# Altium PCB H_bridge_2_layers_fix.PcbDoc
Units mil, origin at the board's own origin, x right, y up, seen from the top; angles counter-clockwise.
Board outline 2814.96 x 3011.81 mil, 2 copper layers (Top Layer, Bottom Layer); 43 components, 19 nets, 107 pads, 13 vias.
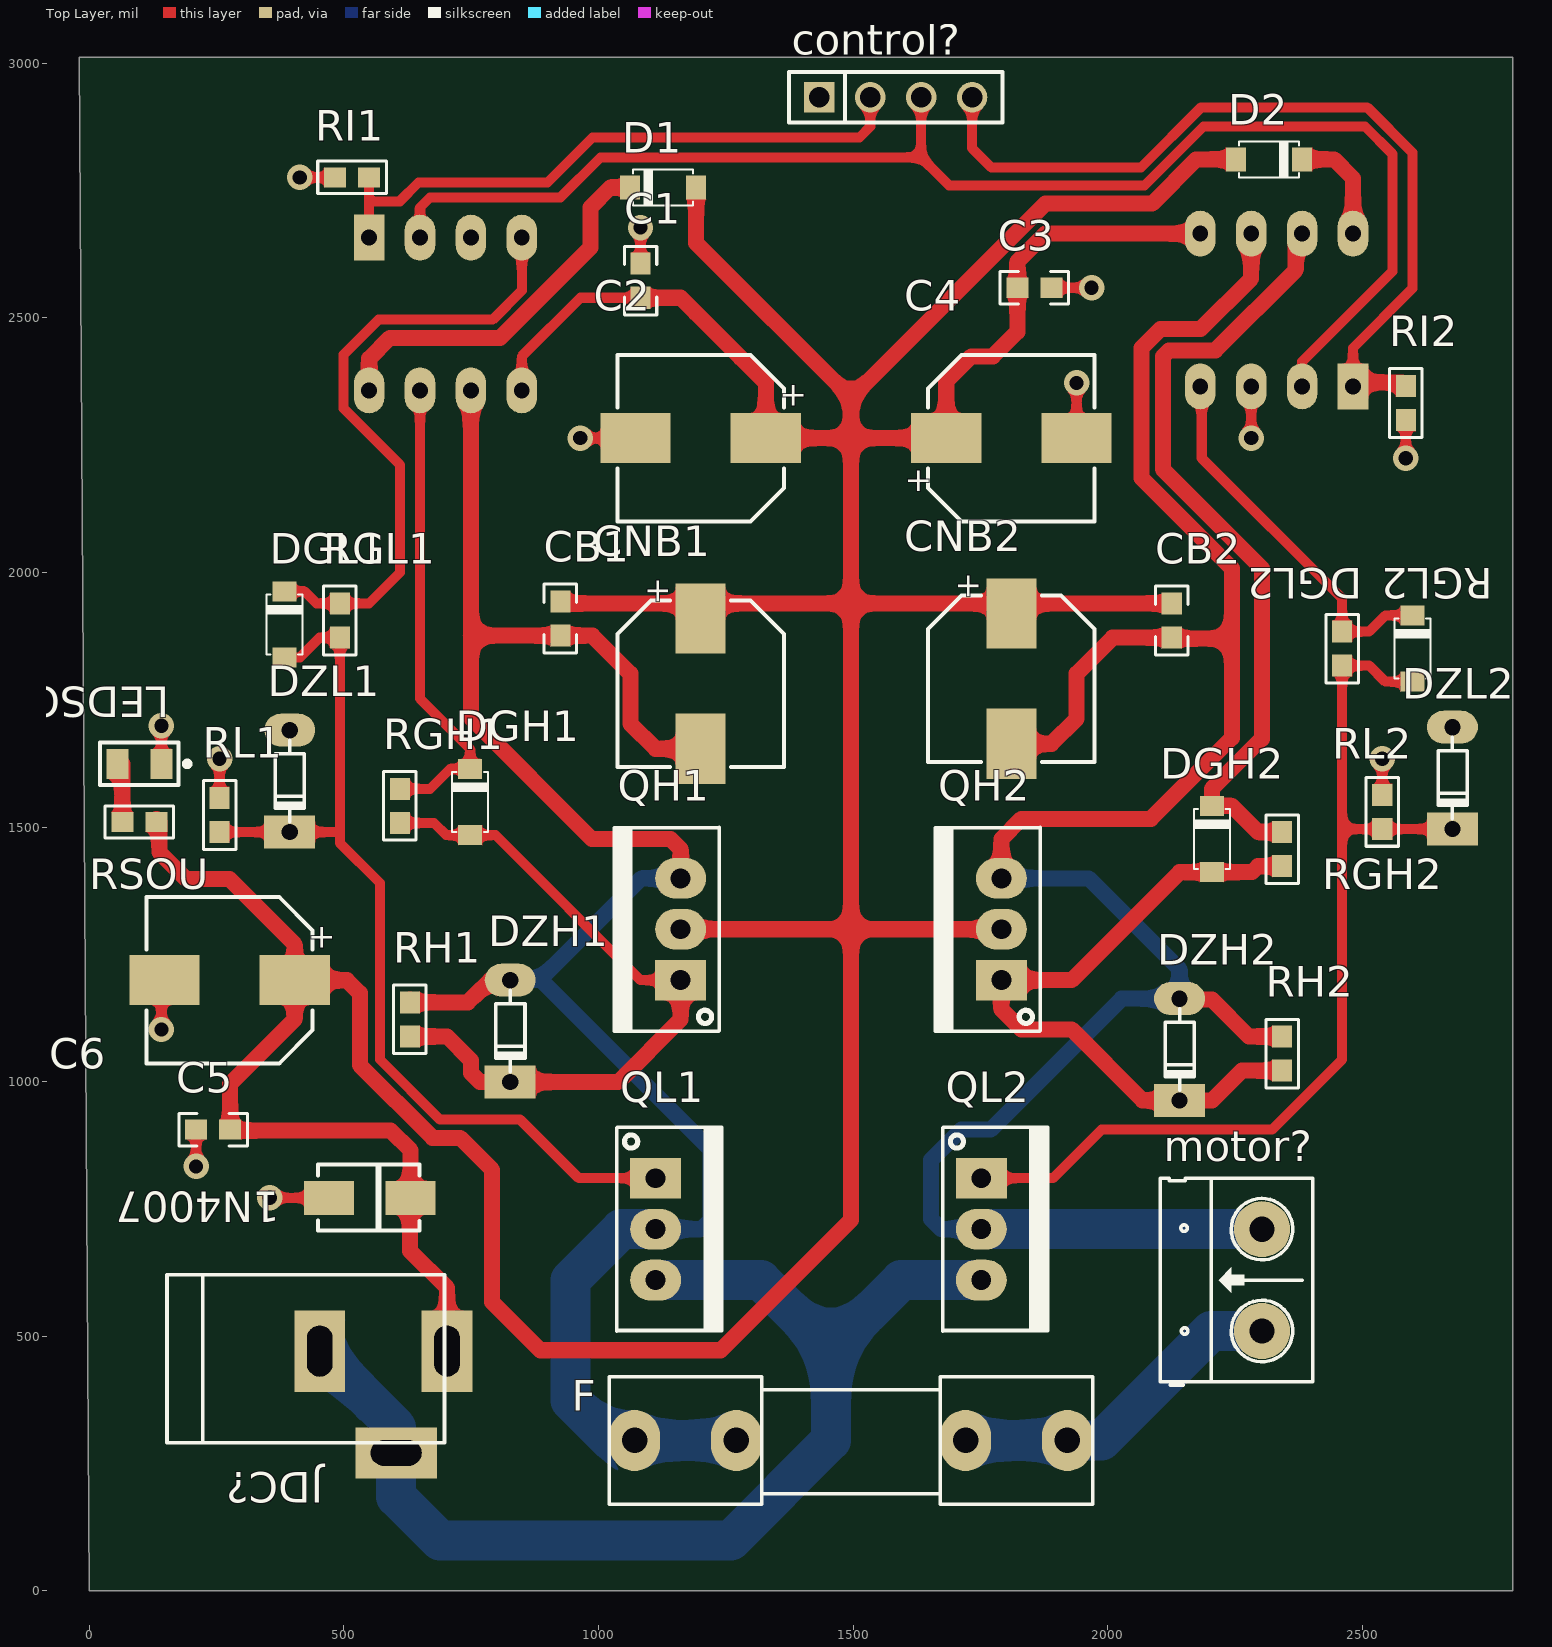
[diagram p0: Top Layer view]
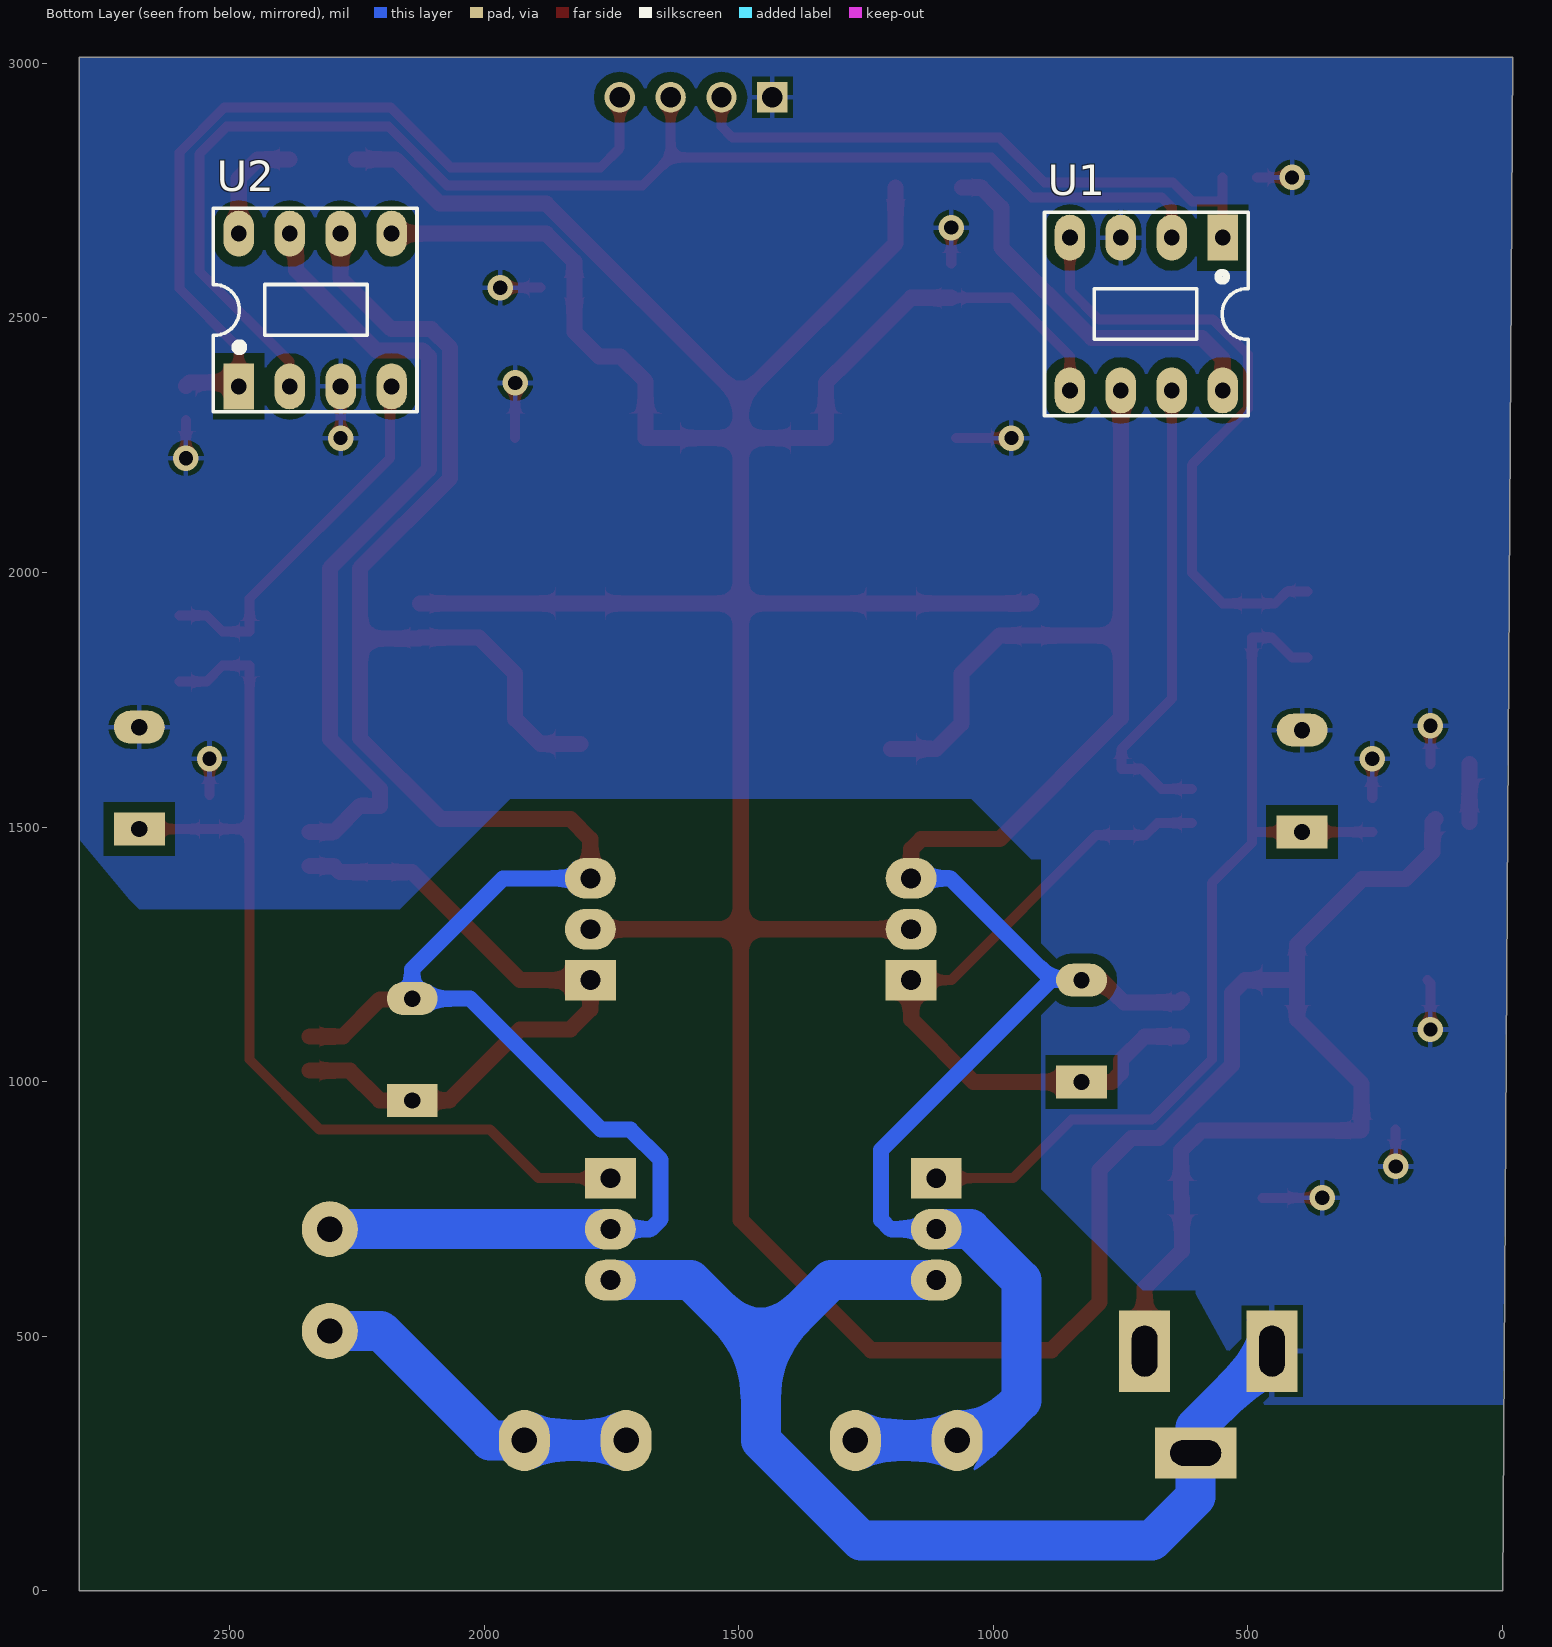
[diagram p1: Bottom Layer view, seen from below]
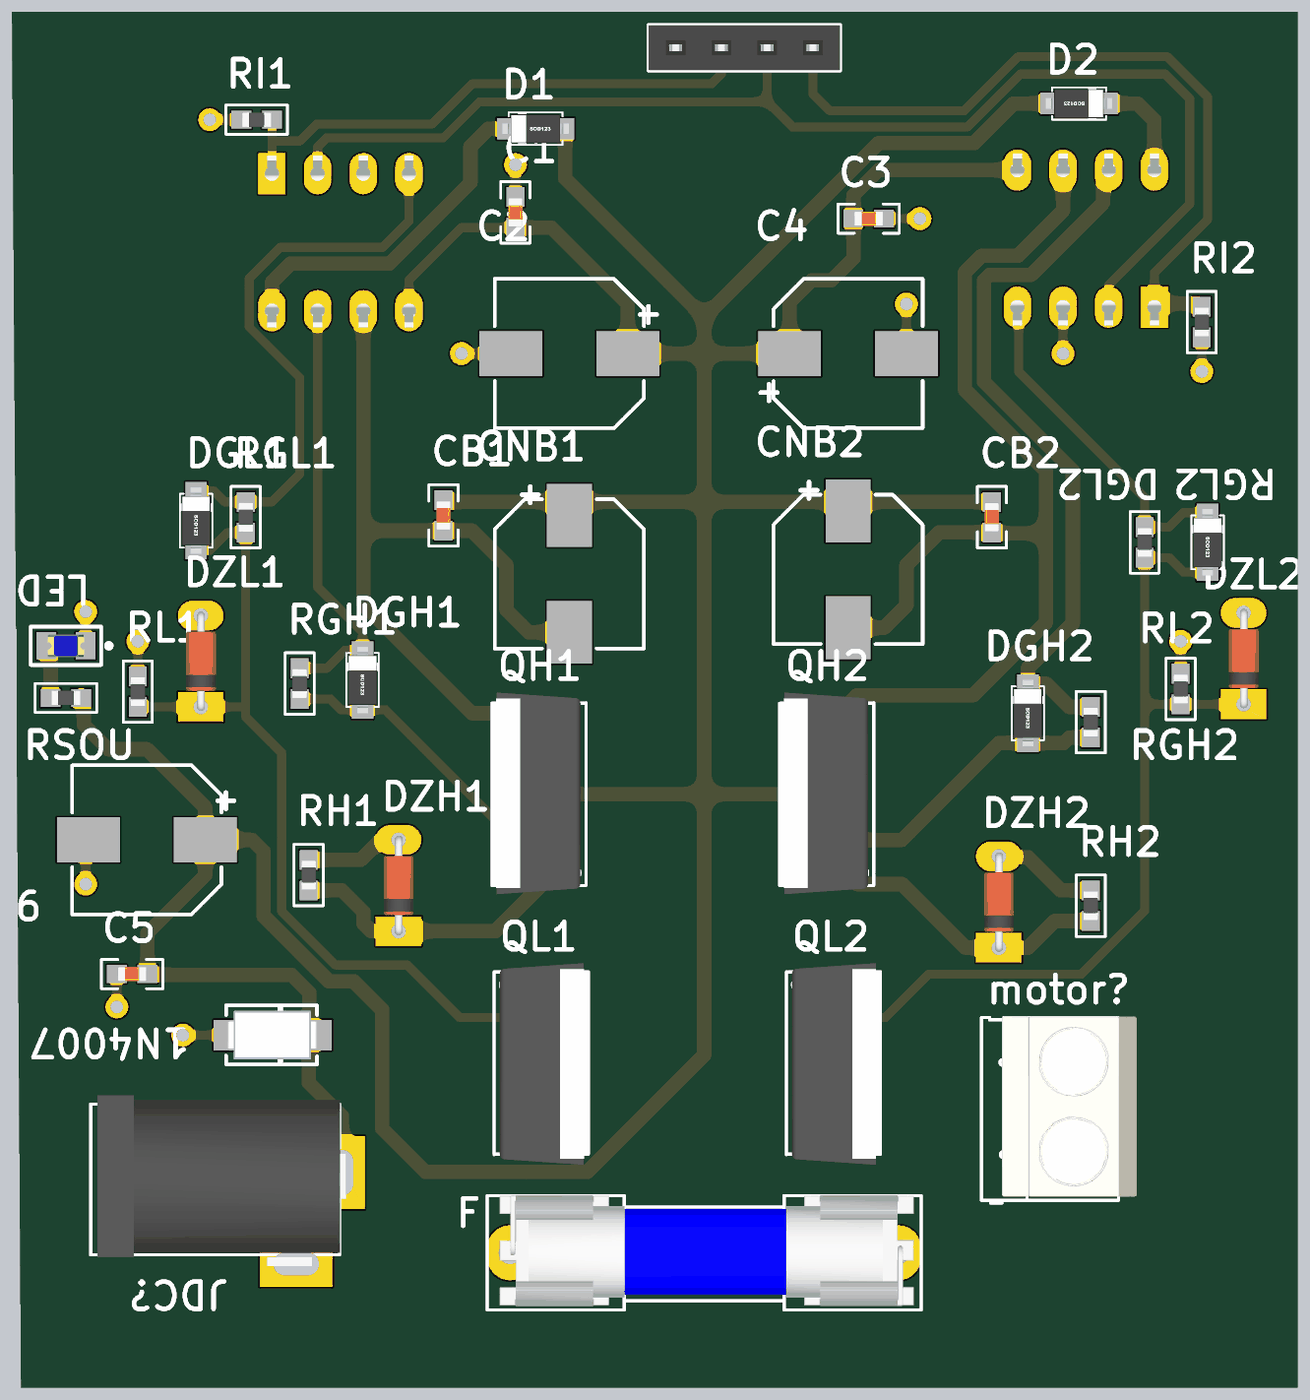
[diagram p2: 3D render of the assembled board from above, using the file's embedded part models]

## Layer stack, top to bottom
Top Solder: solder mask 0.4, Solder Resist, Dk 3.5
Top Layer: signal copper 1.4
Dielectric 1: dielectric 12.6, FR-4, Dk 4.8
Bottom Layer: signal copper 1.4
Bottom Solder: solder mask 0.4, Solder Resist, Dk 3.5

## Board outline
-19.69,3011.81 2795.28,3011.81 2795.28,0 0,0

## Design rules (kind name [scope] priority, off if disabled: settings)
Clearance Clearance_1 [InNamedPolygon('Bottom Layer-No Net')] p1: gap=10 ignorepadtopadclearanceinfootprint=FALSE except(0: Arc-Hole Track-Hole SMDPad-Hole THPad-Hole Via-Hole Fill-Hole Poly-Hole Region-Hole Text-Hole; 20: Arc-Fill Arc-Poly Arc-Region Track-Fill Track-Poly Track-Region THPad-Fill THPad-Poly THPad-Region)
Clearance [All] p2: gap=10 ignorepadtopadclearanceinfootprint=FALSE except(0: Arc-Hole Track-Hole SMDPad-Hole THPad-Hole Via-Hole Fill-Hole Poly-Hole Region-Hole Text-Hole; 20: Arc-Fill Arc-Poly Arc-Region Track-Fill Track-Poly Track-Region THPad-Fill THPad-Poly THPad-Region)
PolygonConnect PolygonConnect_1 [All vs IsNamedPolygon('Bottom Layer-No Net')] p1: connectstyle=Relief reliefconductorwidth=10 reliefentries=4 polygonreliefangle="90 Angle" airgapwidth=10
PolygonConnect [All] p2: connectstyle=Relief reliefconductorwidth=10 reliefentries=4 polygonreliefangle="90 Angle" airgapwidth=10
RoutingVias [All] p1: holewidth=28 width=50 viastyle="Through Hole" minholewidth=28 minwidth=50 maxholewidth=28 maxwidth=50
SolderMaskExpansion [All] p1: expansion=4
Width [All] p1: maxlimit=78.74 minlimit=19.68 preferedwidth=31.5
30 further rules are at their usual default settings.

## Classes and differential pairs
component class H_bridge: C5 C6 DGH1 DGH2 DGL1 DGL2 DZH1 DZH2 DZL1 DZL2 JDC? LEDSOU motor? QH1 QH2 QL1 QL2 RGH1 RGH2 RGL1 RGL2 RH1 RH2 RL1 RL2 RSOU
component class driver: C1 C2 C3 C4 CB1 CB2 CNB1 CNB2 control? D1 D2 RI1 RI2 U1

## Components (designator, comment, footprint, x,y, rotation, side; value= is the part's Value field where it differs from the comment)
1N4007 "DSOU" DIODE_DO214AC_SMA 551.18,771.79 r0 top value=1000V/1A
C1 "104" "CAPC-0603 (1608)" 1082.68,2572.83 r270 top value=330p/50V
C2 "10uF" CAP_ALUM_SMT_NICHICON_H8xH10 1200.79,2263.78 r180 top value=100uF/50V
C3 "104" "CAPC-0603 (1608)" 1856.3,2559.06 r180 top value=330p/50V
C4 "10uF" CAP_ALUM_SMT_NICHICON_H8xH10 1811.02,2263.78 r0 top value=100uF/50V
C5 "104" "CAPC-0603 (1608)" 243.4,905.51 r0 top value=330p/50V
C6 "10uF" CAP_ALUM_SMT_NICHICON_H8xH10 275.59,1199.21 r180 top value=100uF/50V
CB1 "104" "CAPC-0603 (1608)" 925.2,1909.45 r90 top value=330p/50V
CB2 "104" "CAPC-0603 (1608)" 2125.98,1905.51 r90 top value=330p/50V
CNB1 "10uF" CAP_ALUM_SMT_NICHICON_H8xH10 1200.79,1781.5 r270 top value=100uF/50V
CNB2 "10uF" CAP_ALUM_SMT_NICHICON_H8xH10 1811.02,1791.34 r270 top value=100uF/50V
control? "JP4" JP4-C1T 1433.86,2933.07 r0 top
D1 "1N4148" SOD-123 1126.77,2755.91 r90 top value=100V/300MA
D2 "1N4148" SOD-123 2316.85,2811.02 r270 top value=100V/300MA
DGH1 "1N4148" SOD-123 748.03,1549.13 r0 top value=100V/300MA
DGH2 "1N4148" SOD-123 2204.72,1476.38 r0 top value=100V/300MA
DGL1 "1N4148" SOD-123 383.46,1897.8 r0 top value=100V/300MA
DGL2 "1N4148" SOD-123 2598.43,1850.39 r0 top value=100V/300MA
DZH1 "DIODE Zener" DIO-0.5A-SMALL 826.77,1099.21 r90 top
DZH2 "DIODE Zener" DIO-0.5A-SMALL 2141.26,1062.99 r90 top
DZL1 "DIODE Zener" DIO-0.5A-SMALL 393.7,1590.16 r90 top
DZL2 "DIODE Zener" DIO-0.5A-SMALL 2677.17,1596.06 r90 top
F "F1A" Fuse 1496.06,295.28 r0 top value=Fuse
JDC? "Jac DC" DC-IN 577.76,370.87 r0 top
LEDSOU "=Value" LED_0805_BLUE 98.43,1624.02 r0 top
motor? "Header 2_1" HED2 2303.15,510.24 r90 top value="Header 2"
QH1 "IRF840" QTO-220 1161.42,1199.21 r90 top
QH2 "IRF840" QTO-220 1791.34,1199.21 r90 top
QL1 "IRF840" QTO-220 1112.2,810.24 r270 top
QL2 "IRF840" QTO-220 1751.97,810.24 r270 top
RGH1 "1k" "RESC-0603 (1608)" 610.24,1541.34 r90 top value=NF
RGH2 "1k" "RESC-0603 (1608)" 2342.52,1456.69 r270 top value=NF
RGL1 "1k" "RESC-0603 (1608)" 492.13,1905.51 r90 top value=NF
RGL2 "1k" "RESC-0603 (1608)" 2460.63,1850.39 r270 top value=NF
RH1 "4.7k" "RESC-0603 (1608)" 629.92,1122.05 r270 top value=NF
RH2 "4.7k" "RESC-0603 (1608)" 2342.52,1055.12 r270 top value=NF
RI1 "1k" "RESC-0603 (1608)" 516.14,2775.59 r0 top value=NF
RI2 "1k" "RESC-0603 (1608)" 2585.66,2332.68 r90 top value=NF
RL1 "4.7k" "RESC-0603 (1608)" 255.91,1523.62 r270 top value=NF
RL2 "4.7k" "RESC-0603 (1608)" 2539.37,1529.53 r270 top value=NF
RSOU "1k" "RESC-0603 (1608)" 98.43,1509.84 r0 top value=NF
U1 "IR2184" DIP8/W0.3 549.61,2657.48 r0 bottom
U2 "IR2184" DIP8/W0.3 2481.89,2365.35 r180 bottom

## Footprints (in the part's own frame and the unit in brackets; to place one, negate y for a bottom-side part, rotate by r counter-clockwise, add the part's x,y. Pads: shape width x height; smd on the part's side, far side on the other; paste and mask are expansions set on the pad)
CAP_ALUM_SMT_NICHICON_H8xH10 [mm]
  rect 3.5x2.5 smd: 1(-3.25,0) 2(3.25,0)
  silkscreen extent -4.15,-4.15 4.15,4.15, body extent -4.15,-4.15 4.15,4.15, height 10.3
"CAPC-0603 (1608)" [mm] "Resistor, Chip; 1.60 mm L X 0.80 mm W X 0.50 mm H body"
  rect 1.1x1 smd mask+0.1: 1(-0.85,0) 2(0.85,0)
  silkscreen extent -1.71,-0.81 1.71,0.81, body extent -0.8,-0.4 0.8,0.4, height 0.6
DC-IN [mil] "Jac DC input"
  rect 100x160 hole 50 slot 100 at 90 deg: 1(125,100) 2(-125,100)
  rect 160x100 hole 50 slot 100 at 0 deg: 3(25,-100)
  silkscreen extent -425,-80 120,250, body extent -410,-105 134,269, height 434
DIO-0.5A-SMALL [mil] "Diode muoi, W 80mil, L 300mil"
  oval 65x100 hole 32: 1(100,0)
  rect 65x100 hole 32: 2(-100,0)
  silkscreen extent -80,-30 80,28, body extent -108,-33 108,32, height 61
DIODE_DO214AC_SMA [mm] "Diode 2214AC- SMA type"
  rect 2.5x1.7 smd: 1(-2.032,0) 2(2.032,0)
  silkscreen extent -2.59,-1.63 2.46,1.7, body extent -2.53,-1.35 2.47,1.35, height 2.25
DIP8/W0.3 [mil] "8 PIN, W 300mil, Pin to pin 100mil"
  rect 60x90 hole 31: 1(0,0)
  oval 60x90 hole 31: 2(100,0) 3(200,0) 4(300,0) 5(300,300) 6(200,300) 7(100,300) 8(0,300)
  silkscreen extent -50,-50 350,350, body extent -50,-40 350,336, height 201
Fuse [mil] "De Fuse"
  oval 100x120 hole 50: 1(-425,0) 1(-225,0) 2(225,0) 2(425,0)
  silkscreen extent -475,-125 475,125, body extent -448,-117 459,127, height 378
HED2 [mil] "Header 2, 2 pin, hight 300mil, Pin to Pin 200, Colour Green"
  round 110 hole 50: 1(0,0) 2(200,0)
  silkscreen extent -106,-100 300,200, body extent -92,-140 302,155, height 394
JP4-C1T [mm] "4 row, straight, gold plating"
  rect 1.52x1.52 hole 1.02: 1(0,0)
  round 1.52 hole 1.02: 2(2.54,0) 3(5.08,0) 4(7.62,0)
  silkscreen extent -1.52,-1.27 9.14,1.27, body extent -1.52,-1.25 9.14,1.25, height 8.51
LED_0805_BLUE [mm] "LED SMD; Body 2.0 x 1.3 mm (LxW typ)"
  rect 1.1x1.5 smd: 1(-1.1,0) 2(1.1,0)
  silkscreen extent -1.96,-1.07 2.52,1.07, body extent -1.01,-0.62 1.01,0.63, height 1.1
QTO-220 [mil] "TO-220 - 1-2-3"
  rect 80x100 hole 39: 1(0,0)
  oval 80x100 hole 39: 2(100,0) 3(200,0)
  silkscreen extent -100,-76 300,130, body extent -119,-64 322,121, height 755
"RESC-0603 (1608)" [mm] "Resistor, Chip; 1.60 mm L X 0.80 mm W X 0.50 mm H body"
  rect 1.1x1 smd mask+0.1: 1(-0.85,0) 2(0.85,0)
  silkscreen extent -1.71,-0.81 1.71,0.81, body extent -0.8,-0.4 0.8,0.4, height 0.5
SOD-123 [mm] "SOD123, 2-Leads, Body 2.6x1.6mm, Pitch 3.05mm, IPC High Density"
  rect 1.2x1 smd: 1(0,-1.652) 2(0,1.652)
  silkscreen extent -0.9,-1.5 0.9,1.5, body extent -0.8,-1.85 0.8,1.85, height 1.27

## Part data
1N4007: library part 1N4007_SMA, "DIODE GEN PURP 1KV 1A SMA", MPN=MRA4007T3G, Solder=SMT
C1 C3 C5 CB1 CB2: library part 0603N331J500CT, "CAP CER 330PF 50V C0G/NP0 0603", MFR="Walsin Technology Corporation", Category=CAPACITOR, MPN=0603N331J500CT, PinCount=2, Solder=SMT
C2 C4 C6 CNB1 CNB2: library part UWT1H101MNL1GS, "CAP ALUM 100UF 20% 50V SMD", Category=CAPACITOR, MPN=UWT1H101MNL1GS, PinCount=2, Solder=SMT
control?: "WR-PHD 2.54 mm Angled Socket Header", Manufacturer="Würth Elektronik eiSos GmbH", partNo=613004143121, ComponentLink1 Description=Manufacturer, ComponentLink1URL=http://www.we-online.com, ComponentLink2 Description=Datasheet, ComponentLink2URL=http://katalog.we-online.de/em/datasheet/6130xx143121.pdf, Created by="Karrer Zheng", Created Date="29 March 2013", NoPins=04
D1 D2 DGH1 DGH2 DGL1 DGL2: library part 1N4148-W-7, "DIODE GEN PURP 100V 300MA SOD123", MFR="Diodes Incorporated", MPN=1N4148W-7-F, Solder=SMT
DZH1 DZH2 DZL1 DZL2: "Zenner"
F: library part Fuse, "Fuse", Designed by=VanDungEvn
JDC?: library part DCIN, "Jac DC input"
LEDSOU: library part "LED SMD BLUE 0805 SMD", "LED BLUE 0805 SMD", CompanyID=VT-01311, Solder=SMT
motor?: "Header, 2-Pin", Manufacturer="Generic Components", Class=Connector
QH1 QH2 QL1 QL2: "MOSFET N - CHANNEL 500V - 0.75 - 8A - TO-220"
RGH1 RGH2 RGL1 RGL2 RH1 RH2 RI1 RI2 RL1 RL2 RSOU: library part "RESC NF 0603", "RES SMD, Not Fill, 0603", Category=RESISTOR, Solder="Not Fill"
U1 U2: "Half-Bridge Driver"

## Via types
v1: diameter 50, hole 28, Top Layer to Bottom Layer, 13 vias

## Nets (pads, with @x,y where several pads share a name; then routed paths per layer and width w, separated by ;. In a path a pad name is that pad's centre, name@x,y a point inside that pad or via, vN(x,y) a via of type N, cw(c..) or ccw(c..) an arc to the next point about the centre after c; other vN are vias at no path point)
12V: 1N4007.2 C1.2 C2.1 C3.2 C4.1 C5.2 C6.1 CB1.2 CB2.2 CNB1.1 CNB2.1 D1.1 D2.1 JDC?.1 QH1.2 QH2.2 RSOU.2 U1.5 U2.5 | length 10213.3
  Top Layer w19.68: U1.5 849.61,2424.41 964.57,2539.37 C1.2
  Top Layer w31.5: RSOU.2@131.89,1515.75 137.8,1509.84 137.8,1450.79 190.94,1397.64 275.59,1397.64 403.54,1269.68 C6.1 ; JDC?.1@704.33,472.44 JDC?.1 702.76,594.88 629.92,667.72 629.92,770.52 1N4007.2 631.2,864.87 592.13,903.94 278.44,903.94 C5.2 276.87,995.37 403.54,1122.05 C6.1 ; CB1.2 929.13,1938.98 1496.06,1938.98 ; C1.2 1161.42,2539.37 1190.94,2509.84 1279.53,2421.26 1328.74,2372.05 C2.1 1496.06,2263.78 ; QH1.2 1496.06,1299.21 ; D1.1 1191.81,2646.77 1496.06,2342.52 ; QH2.2 1496.06,1299.21 ; CB2.2 1496.06,1938.98 ; U2.5@2165.35,2665.35 1877.95,2665.35 1822.83,2610.24 C3.2 1822.83,2472.44 1774.8,2424.41 1732.28,2424.41 1683.07,2375.2 C4.1 1496.06,2263.78 ; D2.1 2173.85,2811.02 2087.23,2724.41 1877.95,2724.41 1496.06,2342.52 ; C6.1 505.91,1199.21 531.5,1173.62 531.5,1032.34 674.23,889.61 728.35,889.61 791.18,826.77 791.18,567.09 885.83,472.44 1240.16,472.44 1496.06,728.35 1496.06,1299.21 ; 1496.06,1299.21 1496.06,1938.98 ; 1496.06,1938.98 1496.06,2263.78 ; 1496.06,2263.78 1496.06,2342.52
GND: 1N4007.1 C1.1 C2.2 C3.1 C4.2 C5.1 C6.2 control?.1 DZL1.1 DZL2.1 JDC?.2 JDC?.3 LEDSOU.2 QL1.3 QL2.3 RI1.1 RI2.1 RL1.1 RL2.1 U1.3 U2.3 | length 3363.3
  Top Layer w19.68: v1(141.73,1102.36) 141.73,1193.31 C6.2 ; LEDSOU.2 v1(141.73,1698.82) ; v1(209.94,833.37) C5.1 ; RL1.1 v1(255.91,1633.86) ; v1(354.33,771.79) 1N4007.1 ; v1(413.39,2775.59) RI1.1 ; v1(964.57,2263.78) C2.2 ; C1.1 v1(1082.68,2677.17) ; C3.1 v1(1968.5,2559.06) ; C4.2 v1@1938.98,2362.2 ; v1(2281.89,2263.78) U2.3 ; RL2.1 v1(2539.37,1633.86) ; v1(2585.66,2224.41) RI2.1
  Bottom Layer w78.74: JDC?.2 602.76,320.87 JDC?.3 602.76,184.65 688.98,98.43 1259.84,98.43 1456.69,295.28 1456.69,472.44 ; QL1.3 1318.9,610.24 1456.69,472.44 ; QL2.3 1594.49,610.24 1456.69,472.44
  other v1: 1938.98,2372.05
NetCB1_1: CB1.1 CNB1.2 DZH1.1 F.1 QH1.3 QL1.2 RH1.1 U1.6 | length 3986.6
  Top Layer w31.5: RH1.1@629.92,1161.42 635.83,1155.51 743.7,1155.51 787.4,1199.21 DZH1.1 ; U1.6 749.61,1875.98 ; QH1.3 1161.42,1456.69 1141.73,1476.38 987.4,1476.38 749.61,1714.17 749.61,1875.98 ; CNB1.2 1112.2,1653.54 1062.99,1702.76 1062.99,1801.18 988.19,1875.98 CB1.1 749.61,1875.98
  Bottom Layer w31.5: DZH1.1 884.25,1199.21 ; QL1.2 1202.36,710.24 1220.47,728.35 1220.47,866.14 887.4,1199.21 884.25,1199.21 ; QH1.3 1084.25,1399.21 884.25,1199.21
  Bottom Layer w78.74: QL1.2 1044.88,710.24 944.88,610.24 944.88,374.02 1023.62,295.28 1071.06,295.28 F.1@1271.06,295.28
NetCB2_1: CB2.1 CNB2.2 DZH2.1 motor?.2 QH2.3 QL2.2 RH2.1 U2.6 | length 4487
  Top Layer w31.5: QH2.3 1791.34,1476.38 1830.71,1515.75 2085.04,1515.75 2244.09,1674.8 2244.09,1870.08 ; CNB2.2 1889.76,1663.39 1938.98,1712.6 1938.98,1801.18 2009.84,1872.05 CB2.1 2127.95,1870.08 2244.09,1870.08 ; DZH2.1 2142.83,1161.42 2204.72,1161.42 2277.56,1088.58 RH2.1 ; U2.6@2272.27,2658.27 2281.89,2648.65 2281.89,2577.17 2182.32,2477.6 2103.58,2477.6 2066.93,2440.94 2066.93,2185.04 2244.09,2007.87 2244.09,1870.08
  Bottom Layer w31.5: QL2.2 1673.23,710.24 1653.54,729.92 1653.54,846.46 1712.6,905.51 1770.08,905.51 2027.56,1162.99 DZH2.1 2141.26,1220.47 1962.52,1399.21 QH2.3
  Bottom Layer w78.74: QL2.2 motor?.2
Netcontrol?_3: control?.3 U1.2 U2.2 | length 2750.3
  Top Layer w19.68: U1.2 649.61,2716.54 669.29,2736.22 925.2,2736.22 1003.94,2814.96 1633.86,2814.96 ; control?.3 1633.86,2814.96 ; U2.2 2381.89,2413.7 2559.06,2590.87 2559.06,2822.03 2505.5,2875.59 2188.08,2875.59 2072.49,2760 1688.82,2760 1633.86,2814.96
NetD1_2: D1.2 U1.8 | length 759.7
  Top Layer w31.5: U1.8 549.61,2419.68 590.55,2460.63 807.09,2460.63 984.25,2637.8 984.25,2716.54 1023.62,2755.91 D1.2
NetD2_2: D2.2 U2.8 | length 221.4
  Top Layer w31.5: D2.2 2444.88,2811.02 2481.89,2774.02 2481.89,2686 U2.8@2469.12,2673.23
NetDGH1_1: DGH1.1 DZH1.2 QH1.1 RGH1.1 RH1.2 | length 1389.9
  Top Layer w19.68: RGH1.1 677.17,1507.87 700.94,1484.09 DGH1.1 797.8,1484.09 1082.68,1199.21 QH1.1
  Top Layer w31.5: RH1.2 702.76,1088.58 749.61,1041.73 749.61,1017.32 767.72,999.21 DZH1.2 1038.58,999.21 1161.42,1122.05 QH1.1
NetDGH1_2: DGH1.2 RGH1.2 U1.7 | length 938.2
  Top Layer w19.68: RGH1.2 669.29,1574.8 708.66,1614.17 DGH1.2 748.03,1653.54 649.61,1751.97 U1.7
NetDGH2_1: DGH2.1 DZH2.2 QH2.1 RGH2.2 RH2.2 | length 1351
  Top Layer w31.5: RH2.2 2263.78,1021.65 2205.12,962.99 DZH2.2 2068.5,962.99 1929.13,1102.36 1830.71,1102.36 1791.34,1141.73 QH2.1 1929.13,1199.21 2141.26,1411.34 DGH2.1 2283.46,1411.34 2295.35,1423.23 RGH2.2
NetDGH2_2: DGH2.2 RGH2.1 U2.7 | length 1573.5
  Top Layer w31.5: RGH2.1 2295.35,1490.16 2244.09,1541.42 DGH2.2 2204.72,1574.8 2303.15,1673.23 2303.15,2007.87 2108.43,2202.6 2108.43,2423.76 2120.77,2436.1 2211.69,2436.1 2369.12,2593.53 U2.7@2369.12,2673.23
NetDGL1_1: DGL1.1 DZL1.2 QL1.1 RGL1.1 RL1.2 | length 1862.8
  Top Layer w19.68: RL1.2 DZL1.2 486.22,1490.16 492.13,1496.06 ; DGL1.1 413.46,1832.76 452.76,1872.05 RGL1.1 492.13,1496.06 ; QL1.1 961.42,810.24 846.46,925.2 688.98,925.2 570.87,1043.31 570.87,1390.08 492.13,1468.82 492.13,1496.06
NetDGL1_2: DGL1.2 RGL1.2 U1.4 | length 1241.6
  Top Layer w19.68: DGL1.2 422.83,1962.83 446.69,1938.98 RGL1.2 549.61,1938.98 610.24,1999.61 610.24,2211.36 499.76,2321.83 499.76,2427.79 568.19,2496.22 792.34,2496.22 849.61,2553.48 U1.4
NetDGL2_1: DGL2.1 DZL2.2 QL2.1 RGL2.2 RL2.2 | length 1950.7
  Top Layer w19.68: QL2.1 1892.91,810.24 1988.19,905.51 2322.83,905.51 2460.63,1043.31 2460.63,1496.06 ; DGL2.1 2545.35,1785.35 2513.78,1816.93 RGL2.2 2460.63,1496.06 ; DZL2.2 RL2.2 2460.63,1496.06
  Top Layer w31.5: QL2.1 QL2.1@1755.12,807.09
NetDGL2_2: DGL2.2 RGL2.1 U2.4 | length 752.1
  Top Layer w19.68: U2.4@2169.12,2373.23 U2.4@2172.11,2370.24 ; U2.4 2184.88,2362.36 2184.88,2224.41 2460.63,1948.66 RGL2.1 2513.78,1883.86 2545.35,1915.43 DGL2.2
NetF_2: F.2 motor?.1 | length 671.1
  Bottom Layer w78.74: F.2@1721.06,295.28 1921.06,295.28 1988.19,295.28 2203.15,510.24 motor?.1
NetLEDSOU_1: LEDSOU.1 RSOU.1 | length 114.2
  Top Layer w31.5: RSOU.1 LEDSOU.1@64.96,1624.02
PWM1: control?.2 RI1.2 U1.1 | length 1223.7
  Top Layer w19.68: U1.1 549.61,2736.22 ; RI1.2 549.61,2736.22 ; control?.2 1533.86,2875.59 1512.6,2854.33 988.19,2854.33 899.76,2765.91 646.93,2765.91 609.86,2728.83 557,2728.83 549.61,2736.22
PWM2: control?.4 RI2.2 U2.1 | length 1680.2
  Top Layer w19.68: control?.4 1733.86,2833.07 1771.65,2795.28 2065.78,2795.28 2183.89,2913.39 2509.69,2913.39 2598.43,2824.65 2598.43,2557.48 2481.89,2440.94 2481.89,2373.23 U2.1
  Top Layer w31.5: U2.1@2481.89,2373.23 2578.57,2373.23 RI2.2

## Polygon pours and split planes (outlines as drawn)
GND on Bottom Layer "Bottom Layer-No Net" (solid, pour order 0): -19.69,3011.81 2795.28,3011.81 2795.28,1476.38 2696.85,1358.27 2677.17,1338.58 2165.35,1338.58 1948.82,1555.12 1043.31,1555.12 925.2,1437.01 905.51,1437.01 905.51,788.98 707.09,590.55 602.76,590.55 602.76,583.07 481.5,364.96 0,364.96

## Text inside footprints (layer, text, board x,y; h text height)
C2: Mechanical 15 "+" at 1409.79,2367.78 h47.24 r180; Top Overlay "+" at 1409.79,2367.78 h47.24 r180
C4: Mechanical 15 "+" at 1602.02,2159.78 h47.24; Top Overlay "+" at 1602.02,2159.78 h47.24
C6: Mechanical 15 "+" at 484.59,1303.21 h47.24 r180; Top Overlay "+" at 484.59,1303.21 h47.24 r180
CNB1: Mechanical 15 "+" at 1096.79,1990.5 h47.24 r270; Top Overlay "+" at 1096.79,1990.5 h47.24 r270
CNB2: Mechanical 15 "+" at 1707.02,2000.34 h47.24 r270; Top Overlay "+" at 1707.02,2000.34 h47.24 r270